# EAGLE board AltStick (EAGLE 6.1)
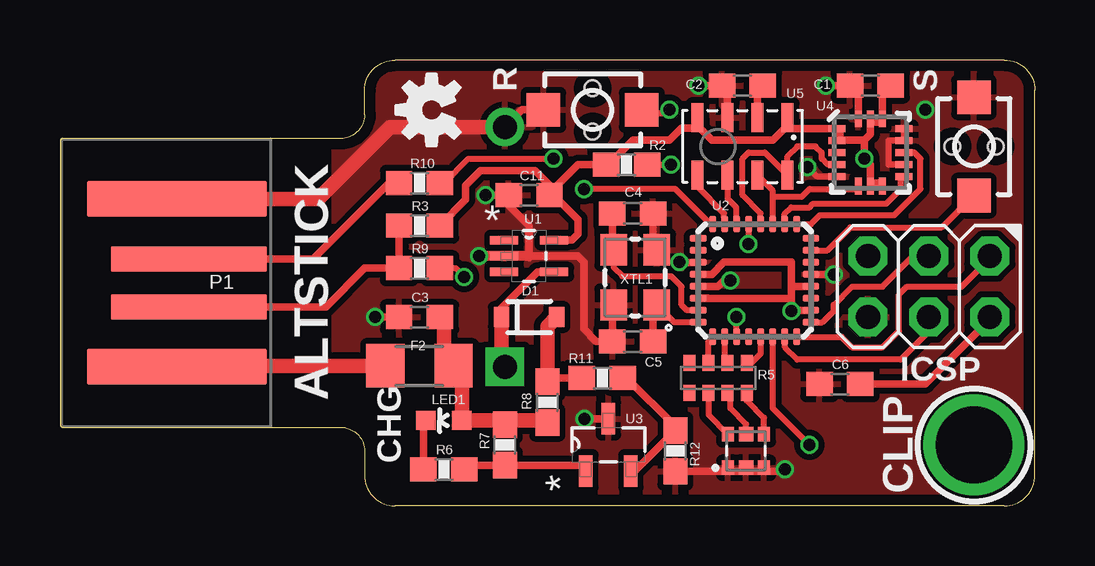
[diagram p0: board, top side]
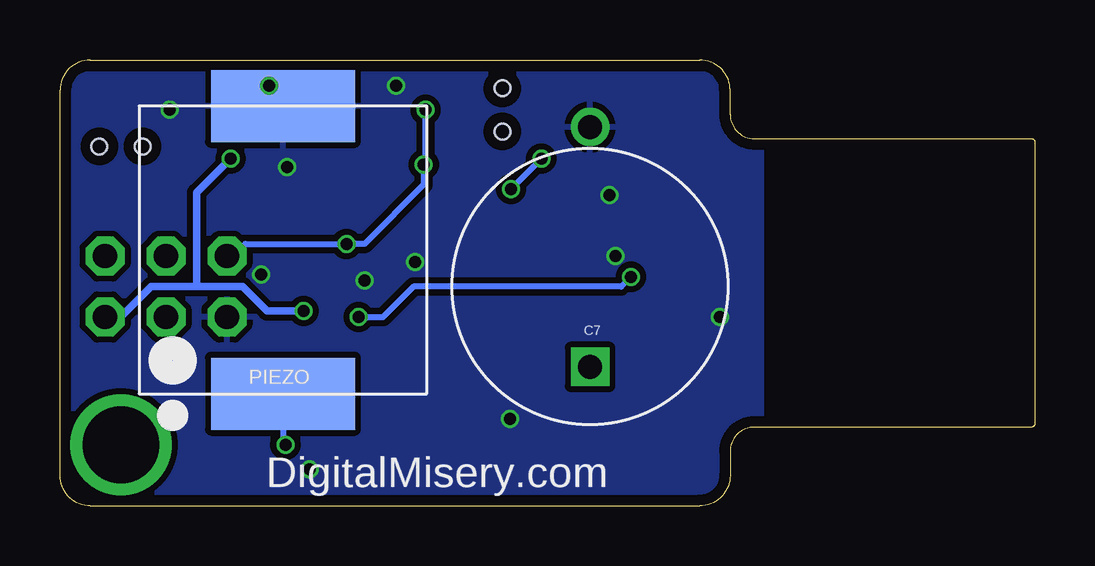
[diagram p1: board, bottom side, seen from below]

Size 40.64 x 18.59 mm. Coordinates in mm from the lower left corner, seen from the top.
Outline: 40.64,1.27 40.64,17.32 arc90 39.37,18.59 13.97,18.59 arc90 12.7,17.32 12.7,16.32 arc-90 11.7,15.32 0.15,15.32 arc90 0,15.16 0,3.43 arc90 0.15,3.28 11.7,3.28 arc-90 12.7,2.28 12.7,1.27 arc90 13.97,0 39.37,0 arc90 40.64,1.27
Copper layers (1*16): Top 0.035mm / dielectric 1.5mm / Bottom 0.035mm
Design rules: minimum track width 6mil, minimum drill 9.5mil, track to track 6mil, track to pad 6mil, pad to pad 6mil, via to via 6mil, smd to smd 6mil, copper to edge 18mil, drill to drill 8mil, minimum pad ring 12mil, minimum via ring 4mil, stop-mask expansion 2mil, vias tented up to drill 25mil, thermal gap 10mil
Net classes: 0 default: width 0.152 mm, drill 0.241 mm, clearance 0.152 mm

## Footprints (pad centres in the part's own frame; a part is rotated, then mirrored left to right if it is on the bottom)
C0603 = smd 1.1 x 1: 1 -0.85,0; 2 0.85,0
KR-H11.5 = drill 1 square: 1 -3.35,0 | drill 1: 2 6.65,0
SOD-323 = smd 0.63 x 0.83: 1 -1.15,0; 2 1.15,0
R1206 = smd 1.6 x 1.803: 1 -1.422,0; 2 1.422,0
2X03 = drill 1.016 octagon: 1 -2.54,-1.27; 2 -2.54,1.27; 3 0,-1.27; 4 0,1.27; 5 2.54,-1.27; 6 2.54,1.27
LED-0603 = smd 0.8 x 0.8: A 0,-0.75; C 0,0.75
19-337 = smd 0.6 x 0.5: 1 -0.7,0.75; 3 -0.7,-0.75; 4 0.7,0.75; 6 0.7,-0.75 | smd 0.6 x 0.6: 2 -0.7,0; 5 0.7,0
USB-A-PCB = smd 7.5 x 1.5: 5V -0.2,-3.5; GND -0.2,3.5 | smd 6.5 x 1.067: USB_M 0.3,-1; USB_P 0.3,1
BUZZER-12X12-SMT = smd 3 x 6: 1 -6,0; 2 6,0
0603-RES = smd 1.1 x 1: 1 -0.85,0; 2 0.85,0
0603-ARV = smd 0.5 x 0.65: 1 -1.2,-0.625; 2 -0.4,-0.625; 3 0.4,-0.625; 4 1.2,-0.625; 5 1.2,0.625; 6 0.4,0.625; 7 -0.4,0.625; 8 -1.2,0.625
TACTILE_SWITCH_SMD_2PIN_TINY = smd 1.4 x 1.4: 1 -2.05,0; 2 2.05,0 | hole 0.65: 0,0.9; 0,-0.9
SOT65P210X110-5N = smd 1.168 x 0.356: 1 -1.041,0.66; 2 -1.041,0; 3 -1.041,-0.66; 4 1.041,-0.66; 5 1.041,0.66
MLF32 = smd 0.7 x 0.3: 1 -2.35,1.75; 2 -2.35,1.25; 3 -2.35,0.75; 4 -2.35,0.25; 5 -2.35,-0.25; 6 -2.35,-0.75; 7 -2.35,-1.25; 8 -2.35,-1.75; 17 2.35,-1.75; 18 2.35,-1.25; 19 2.35,-0.75; 20 2.35,-0.25; 21 2.35,0.25; 22 2.35,0.75; 23 2.35,1.25; 24 2.35,1.75 | smd 0.3 x 0.7: 9 -1.75,-2.35; 10 -1.25,-2.35; 11 -0.75,-2.35; 12 -0.25,-2.35; 13 0.25,-2.35; 14 0.75,-2.35; 15 1.25,-2.35; 16 1.75,-2.35; 25 1.75,2.35; 26 1.25,2.35; 27 0.75,2.35; 28 0.25,2.35; 29 -0.25,2.35; 30 -0.75,2.35; 31 -1.25,2.35; 32 -1.75,2.35
SOT95P237X112-3N = smd 1.321 x 0.559: 1 -1.092,0.94; 2 -1.092,-0.94; 3 1.092,0
LGA16-3MM = smd 0.7 x 0.28: 1 -1.4,1; 2 -1.4,0.5; 3 -1.4,0; 4 -1.4,-0.5; 5 -1.4,-1; 9 1.4,-1; 10 1.4,-0.5; 11 1.4,0; 12 1.4,0.5; 13 1.4,1 | smd 0.28 x 0.7: 6 -0.5,-1.4; 7 0,-1.4; 8 0.5,-1.4; 14 0.5,1.4; 15 0,1.4; 16 -0.5,1.4
LGA8 = smd 1.2 x 0.5: 1 -1.2,1.875; 2 -1.2,0.625; 3 -1.2,-0.625; 4 -1.2,-1.875; 5 1.2,-1.875; 6 1.2,-0.625; 7 1.2,0.625; 8 1.2,1.875
CRYSTAL-SMD-3X2 = smd 1.3 x 1.1: 1 -1.15,-0.9; 2 1.15,-0.9; 3 1.15,0.9; 4 -1.15,0.9

## Placement (x,y rotation side)
C1  100nF  [C0603]  33.78,17.53 180 top
C2  100nF  [C0603]  28.45,17.53 180 top
C3  1uF  [C0603]  14.99,7.87 180 top
C4  18pF  [C0603]  23.88,12.19 0 top
C5  18pF  [C0603]  23.88,6.86 180 top
C6  100nF  [C0603]  32.51,5.08 180 top
C7  0.47F  [KR-H11.5]  18.54,9.14 90 bottom
C11  1uF  [C0603]  19.56,12.95 180 top
D1  [SOD-323]  19.56,7.87 0 top
F2  [R1206]  14.99,5.84 0 top
ICSP  ICSP  [2X03]  36.22,9.14 180 top
LED1  Green  [LED-0603]  16,3.56 90 top
LED2  RGBLEDSMT  [19-337]  28.6,2.29 90 top
P1  USBPCB  [USB-A-PCB]  5.08,9.3 0 top
PIEZO  BUZZERSMD12X12  [BUZZER-12X12-SMT]  31.34,10.67 270 bottom
R2  10k  [0603-RES]  23.62,14.22 180 top
R3  1.5k  [0603-RES]  14.99,11.68 180 top
R5  [0603-ARV]  27.43,5.33 0 top
R6  1K  [0603-RES]  16,1.52 180 top
R7  1k  [0603-RES]  18.54,2.54 90 top
R8  20  [0603-RES]  20.32,4.32 90 top
R9  30  [0603-RES]  14.99,9.91 180 top
R10  30  [0603-RES]  14.99,13.46 180 top
R11  95k  [0603-RES]  22.61,5.33 180 top
R12  100k  [0603-RES]  25.65,2.29 90 top
S1  RESET  [TACTILE_SWITCH_SMD_2PIN_TINY]  22.2,16.51 0 top
S2  BUTTON  [TACTILE_SWITCH_SMD_2PIN_TINY]  38.1,14.99 90 top
U1  TPS71533DCKR  [SOT65P210X110-5N]  19.56,10.41 0 top
U2  ATMEGA168MLF  [MLF32]  28.96,9.4 0 top
U3  TL431CDBZR  [SOT95P237X112-3N]  22.86,2.54 90 top
U4  LIS331  [LGA16-3MM]  33.78,14.73 0 top
U5  MPL3115A2LGA8  [LGA8]  28.45,14.99 270 top
U$2  OSHW-LOGOS  [OSHW-LOGO-S]  15.49,16.51 90 top
XTL1  12MHz  [CRYSTAL-SMD-3X2]  23.98,9.53 90 top

## Library data of the parts
C1-C6 C11 = resistor
C7 = DigitalMisery
D1 = SparkFun-DiscreteSemi
F2 = adafruit
ICSP = pinhead
LED1 = SparkFun-LED
LED2 P1 PIEZO S1 S2 = freetronics-master-v1
R2 R3 R5-R12 = SparkFun-Passives
U1 = TI TPS71533; DESCRIPTION: Linear Regulator; MPN: TPS71533DCKR; OC_FARNELL: 1135383; OC_NEWARK: 77C0815; PACKAGE: SC-70-5; SUPPLIER: Texas Instruments
U2 = SparkFun-DigitalIC
U3 = TI TL431; DESCRIPTION: PRECISION PROGRAMMABLE REFERENCE; MPN: TL431CDBZR; OC_FARNELL: 1716917; OC_NEWARK: 44J2408; PACKAGE: SOT23-3; SUPPLIER: Texas Instruments
U4 U5 = SparkFun-Sensors
U$2 = SparkFun-Aesthetics
XTL1 = freetronics-jon

## Nets
3.3V: C1.1 C6.1 C11.1 ICSP.2 R2.2 R3.1 U1.5 U2.4 U2.6 U2.18 U2.20 U4.1 U4.7 U4.8 U4.14 U4.15 U5.1 U5.4
ACC_I1: U2.25 U4.11
ACC_I2: U2.26 U4.9
ALT_I1: U2.30 U5.6
ALT_I2: U2.31 U5.5
D+: P1.USB_P R10.2
D-: P1.USB_M R3.2 R9.2
GND: C1.2 C2.2 C3.2 C4.2 C5.2 C6.2 C7.2 C11.2 ICSP.6 LED2.1 LED2.2 LED2.3 P1.GND PIEZO.1 R12.1 S1.1 S2.2 U1.2 U2.3 U2.5 U2.21 U3.3 U4.5 U4.10 U4.12 U4.13 U4.16 U5.3 XTL1.2 XTL1.4
LED1: R5.7 U2.9
LED2: R5.6 U2.10
LED3: R5.5 U2.13
MISO: ICSP.1 U2.16
MOSI: ICSP.4 U2.15
N$1: S2.1 U2.23
N$2: F2.1 P1.5V
N$4: LED2.4 R5.2
N$5: LED2.5 R5.3
N$6: LED1.C R6.2
N$7: R6.1 R7.1 U3.1
N$8: R11.1 R12.2 U3.2
N$9: C7.1 D1.1 U1.4
N$10: D1.2 R8.2 R11.2
N$11: C4.1 U2.7 XTL1.3
N$12: C5.1 U2.8 XTL1.1
N$13: LED2.6 R5.4
N$14: U2.24
N$15: C2.1 U5.2
PIEZO: PIEZO.2 U2.14
RD+: R10.1 U2.32
RD-: R9.1 U2.11
RESET: ICSP.5 R2.1 S1.2 U2.29
SCK: ICSP.3 U2.17
SCL: U2.28 U4.4 U5.8
SDA: U2.27 U4.6 U5.7
USBVCC: C3.1 F2.2 LED1.A R7.2 R8.1

## Tracks (layer width: path | path; a pad name or v marks a point on that pad's centre or on a via)
3.3V  (via drill 0.5 pad 0.61)
  Top 0.254: 26.62,8.64 U2.6 | 34.29,13.46 34.28,13.46 U4.8 | 33.78,13.46 U4.7 | 30.48,8.15 v30.48,8.13
  Top 0.305: U2.18 30.48,8.15 30.48,8.64 | 30.48,9.14 30.48,10.16 27.69,10.16 27.18,9.65 U2.4 | 30.48,9.14 30.48,8.64 | 26.67,15.75 27.18,15.24 29.72,15.24 30.32,15.85 U5.1 30.32,15.73 U4.1 32.51,15.73 32.51,15.24 33.53,15.24 | 26.67,15.75 26.67,16.09 U5.4 | 33.78,16 33.78,15.49 33.53,15.24 | 33.78,16 34.28,16 | 26.62,8.64 26.64,8.66 27,8.66 | 30.48,8.64 27.18,8.64 27.17,8.65 U2.6 | 26.67,15.75 25.91,15.75 25.4,15.24 23.88,15.24 22.86,14.22 R2.2 21.59,14.22 20.41,13.04 C11.1 | U1.5 21.34,11.07 21.59,11.33 21.59,11.94 20.57,12.95 C11.1 | U2.20 30.48,9.15 30.48,9.14 | 33.53,15.24 v33.53,14.48 33.78,14.22 33.78,13.46 34.29,13.46 | C11.1 20.41,13.37 19.81,13.97 17.53,13.97 16.92,13.36 16.92,12.76 R3.1 | C6.1 36.07,5.08 38.76,7.77 ICSP.2 | 33.78,16 U4.15 | 34.29,16 34.28,16 | 34.28,16 U4.14 34.28,17.18 C1.1
  Bottom 0.305: ICSP.2 38.1,7.87 36.83,9.14 34.95,9.14 | 34.95,9.14 33.02,9.14 32,8.13 v30.48,8.13 | v33.53,14.48 34.95,13.06 34.95,9.14
ACC_I1
  Top 0.254: U2.25 31.31,11.75 31.67,12.12 34.77,12.12 35.87,13.21 35.87,14.48 35.61,14.73 U4.11
ACC_I2
  Top 0.254: U4.9 35.05,13.6 35.05,13.21 34.44,12.6 31.39,12.6 31.24,12.45 30.48,12.45 30.21,12.17 U2.26
ALT_I1
  Top 0.254: U5.6 27.82,12.82 28.19,12.45 28.19,12.01 U2.30
ALT_I2
  Top 0.254: U2.31 27.69,12.02 27.69,12.19 26.57,13.3 U5.5
D+
  Top 0.305: P1.USB_P 10.55,10.3 13.72,13.46 R10.2 14.22,13.46
D-
  Top 0.305: P1.USB_M 11.09,8.3 12.7,9.91 R9.2 R3.2
GND  (via drill 0.5 pad 0.61)
  Top 0.254: U4.13 U4.12 34.54,15.24 34.54,14.22 34.55,14.23 U4.10 | XTL1.2 24.9,10.68 | U4.5 31.56,13.73 v31.17,14.12
  Top 0.305: C2.2 27.82,17.3 U5.3 27.82,17.39 27.69,17.53 v26.62,17.53 | 25.14,10.68 XTL1.2 | U2.21 v32.26,9.65 | U2.5 27.43,9.14 27.69,9.4 v27.94,9.4 | XTL1.2 24.73,10.83 C4.2 | XTL1.4 23.03,8.32 C5.2 22.35,6.86 21.84,7.37 21.84,10.16 21.59,10.41 19.56,10.41 19.56,11.68 18.71,12.53 C11.2 v17.73,12.95 | U4.13 35.29,15.73 | C3.2 v13.13,7.87 | R12.1 29.2,1.44 | 29.2,1.44 LED2.3 | 29.2,1.44 30.14,1.44 v30.23,1.52 | U3.3 v21.87,3.63 | S1.1 19.26,16.51 C7.2 | 24.88,10.16 XTL1.2 | U2.3 25.83,10.15 v25.83,10.16 | U4.16 33.28,16.5 33.27,16.51 33.27,17.18 C1.2 v31.93,17.53
  Top 0.406: U1.2 v17.48,10.41 | 19.56,10.41 18.54,10.41
  Top 0.61: P1.GND 10.76,12.8 13.76,15.79 C7.2 18.54,15.75
  Bottom 0.305: 32,17.53 v31.93,17.53 31.34,17.53 PIEZO.1
  other vias: 36.07,16.51
  pour Bottom (isolate 0.254): 11.43,15.24 11.43,3.3 11.68,3.3 arc-90 12.7,2.29 12.7,1.27 arc90 13.97,0 39.37,0 arc90 40.64,1.27 40.64,17.27 arc90 39.37,18.54 13.97,18.54 arc90 12.7,17.27 12.7,16.26 arc-90 11.68,15.24
  pour Top (isolate 0.254): 11.43,15.24 11.43,3.3 11.68,3.3 arc-90 12.7,2.29 12.7,1.27 arc90 13.97,0 39.37,0 arc90 40.64,1.27 40.64,17.27 arc90 39.37,18.54 13.97,18.54 arc90 12.7,17.27 12.7,16.26 arc-90 11.68,15.24
LED1
  Top 0.254: R5.7 27.03,6.87 U2.9
LED2
  Top 0.254: U2.10 27.71,6.08 R5.6
LED3
  Top 0.254: R5.5 28.82,5.96 29.21,6.35 29.21,7.11 U2.13
MISO
  Top 0.254: U2.16 32.58,7.05 33.02,6.6 34.29,6.6 34.98,7.29 34.98,8.81 35.31,9.14 37.59,9.14 38.76,10.31 ICSP.1
MOSI
  Top 0.254: ICSP.4 36.22,7.26 35.05,6.1 30.73,6.1 30.23,6.6 30.23,7.28 U2.15
N$1
  Top 0.254: U2.23 31.98,10.65 32.94,11.61 36.75,11.61 38.1,12.95 S2.1
N$2
  Top 0.305: 4.93,5.84 P1.5V
  Top 0.61: F2.1 4.93,5.84
N$3  (via drill 3.2)
  other vias: 38.1,2.54
N$4
  Top 0.254: R5.2 27.03,3.8 LED2.4
N$5
  Top 0.254: LED2.5 28.6,3.4 27.94,4.06 27.94,4.6 R5.3
N$6
  Top 0.305: R6.2 15.15,3.46 LED1.C
N$7
  Top 0.305: U3.1 21.68,1.69 R7.1 17.02,1.69 R6.1
N$8
  Top 0.254: 23.62,5.33 R11.1
  Top 0.305: 23.62,5.33 25.65,3.3 R12.2 23.97,1.45 U3.2
N$9
  Top 0.254: C7.1 18.54,5.84
  Top 0.305: U1.4 19.91,9.75 18.41,8.25 D1.1
  Top 0.61: D1.1 18.41,5.98 18.54,5.84
N$10
  Top 0.305: R11.2 20.49,5.33 R8.2
  Top 0.61: R8.2 20.32,7.49 D1.2
N$11
  Top 0.254: XTL1.3 23.08,9.94 23.44,9.58 25.48,9.58 25.91,9.14 25.91,8.38 26.14,8.15 U2.7
  Top 0.305: XTL1.3 23.03,10.73 C4.1
N$12
  Top 0.254: U2.8 25.61,7.65 XTL1.1
  Top 0.305: XTL1.1 24.73,8.22 C5.1
N$13
  Top 0.254: R5.4 28.63,4.39 29.35,3.67 LED2.6
N$15
  Top 0.305: U5.2 29.07,17.3 C2.1
PIEZO  (via drill 0.5 pad 0.61)
  Top 0.254: U2.14 29.71,4.08 v31.24,2.54
  Bottom 0.254: PIEZO.2 31.34,2.64 v31.24,2.54
RD+  (via drill 0.5 pad 0.61)
  Top 0.254: v21.84,13.21 25.65,13.21 27.18,11.68 27.18,11.75 U2.32 | R10.1 16,13.46 17.02,14.48 v20.57,14.48
  Bottom 0.254: v21.84,13.21 v20.57,14.48
RD-  (via drill 0.5 pad 0.61)
  Top 0.254: U2.11 28.19,7.06 v28.19,7.87 | R9.1 16.51,9.91 v16.84,9.55
  Bottom 0.254: v28.19,7.87 27.18,7.87 25.91,9.14 17.25,9.14 v16.84,9.55
RESET  (via drill 0.5 pad 0.61)
  Top 0.254: U2.29 28.71,11.18 v28.7,10.92 | v25.48,14.22 R2.1 24.38,14.22 | S1.2 24.38,16.38 25.27,16.38 v25.4,16.51
  Bottom 0.254: ICSP.5 32.92,10.92 v28.7,10.92 27.94,10.92 25.48,13.39 v25.48,14.22 25.4,14.22 v25.4,16.51
SCK
  Top 0.254: U2.17 31.78,7.65 32.26,8.13 32.26,8.38 33.02,9.14 34.29,9.14 35.56,10.41 ICSP.3 36.32,10.41
SCL
  Top 0.254: U4.4 32,14.23 31.75,14.48 31.75,14.73 31.5,14.99 30.73,14.99 30.32,14.57 U5.8 29.38,14.73 28.7,14.73 28.45,14.48 28.45,12.95 29.21,12.2 U2.28
SDA
  Top 0.254: U2.27 29.72,12.01 29.72,12.85 | 29.07,13.6 U5.7 29.72,13.14 29.72,12.85 | 29.72,12.85 29.79,12.88 30.91,12.88 31.24,13.21 33.16,13.21 U4.6
USBVCC
  Top 0.254: 16,6.1 15.95,6.1 15.95,6.3 | R7.2 18.54,3.56
  Top 0.305: 15.84,6.41 15.95,6.3 F2.2 16.75,5.5 | 20.23,3.56 R8.1
  Top 0.61: 20.23,3.56 18.54,3.56 LED1.A 16.75,5.5 | C3.1 16,7.71 16,6.1

## Text on the board
tPlace: R | S | ALTSTICK | CHG | CLIP
bPlace: DigitalMisery.com
bNames: PIEZO